# Allegro board AUTO_SAVE.brd
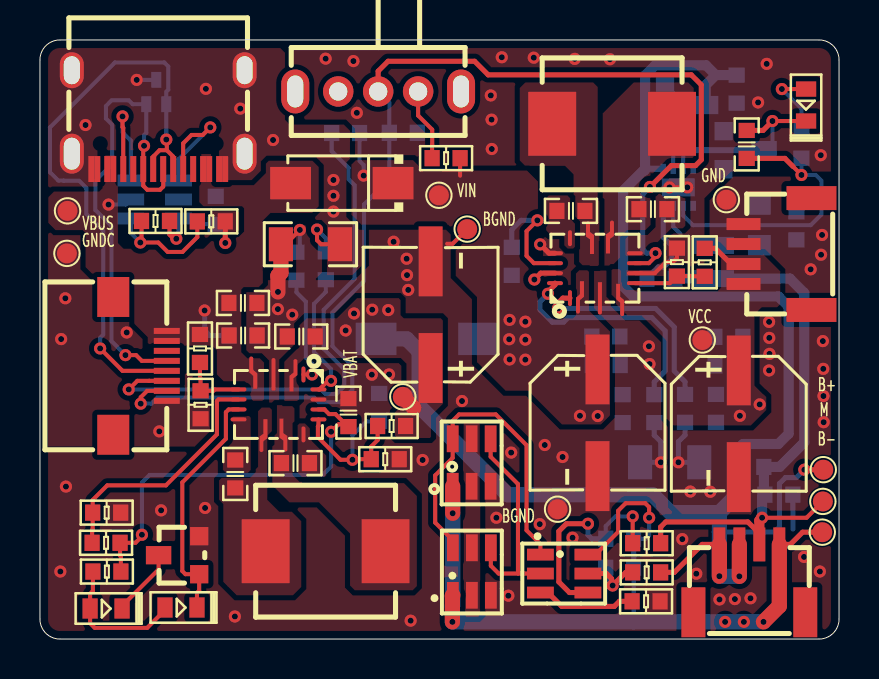
[diagram p0: board, top side]
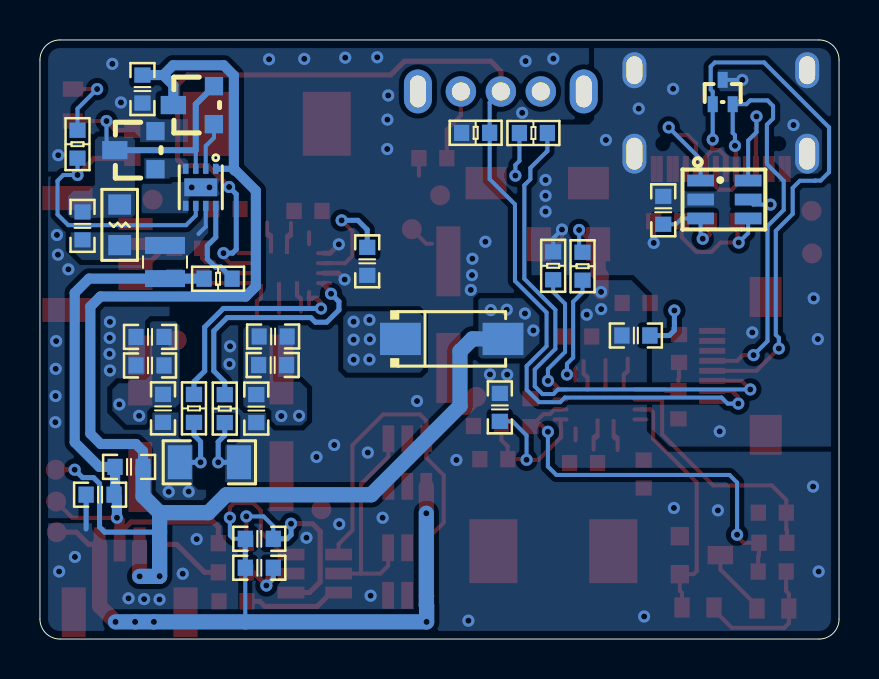
[diagram p1: board, bottom side, seen from below]

Outline 40 x 30 mm; copper layers: TOP, BOTTOM. Coordinates in mm from the lower left corner of the outline.
Outline path: 0,29 0,1 arc(0.29,0.29) 1,0 39,0 arc(39.71,0.29) 40,1 40,29 arc(39.71,29.71) 39,30 1,30 arc(0.29,29.71) 0,29

## Design rules (mm)
constraint set DEFAULT: min track width 0.203
net group N892302: nets N892302 N892320
net group N900408: nets N900465 N903479
net group 3V7: nets 3V7 N902157 N907575
net group N897015: nets N897015 N897538 N898541

## Placement (name value [footprint] x y rotation side)
C1  0.1uF  [C0603]  30.68 21.53 0 top
C2  0.1uF  [C0603]  26.58 21.44 0 top
C3  0.1uF  [C0603]  34.49 13.7 180 bottom
C4  0.1uF  [C0603]  34.49 15.13 180 bottom
C5  0.1uF  [C0603]  33.84 11.55 90 bottom
C6  100uF  [CAP_SMD-6_3X7_7]  34.98 10.78 270 top
C7  100uF  [CAP_SMD-6_3X7_7]  27.91 10.83 270 top
C8  0.1uF  [C0603]  28.35 13.72 0 bottom
C9  1uF  [C0603]  29.17 11.54 90 bottom
C10  0.1uF  [C0603]  28.33 15.15 0 bottom
C11  10uF  [C0603]  23.62 18.91 90 bottom
C13  0.1uF  [C0603]  9.78 8.27 90 top
C14  0.1uF  [C0603]  12.79 8.81 180 top
C15  1uF  [C0603]  8.8 21.47 90 bottom
C16  1uF  [C0603]  10.16 16.83 0 top
C17  22uF  [C0603]  10.17 15.2 0 top
C18  22uF  [C0603]  10.17 15.2 0 bottom
C19  10uF  [C0603]  15.44 11.34 270 top
C20  22pF  [C0603]  16.98 11.6 270 bottom
C21  22pF  [C0603]  13.08 15.15 0 top
C23  10uF  [C0603]  34.87 27.54 90 bottom
C24  10nF  [C0603]  35.38 24.77 270 top
C25  1nF  [C0603]  37.87 20.69 90 bottom
C27  10uF  [C0603]  35.54 8.62 0 bottom
C28  10uF  [C0603]  36.99 7.23 0 bottom
C29  0.1uF  [C0603]  29.02 5.02 180 bottom
C30  0.1uF  [C0603]  29.02 3.57 0 bottom
C31  100uF  [CAP_SMD-6_3X7_7]  19.55 16.24 90 top
D1  Green  [LED0603]  3.31 1.53 0 top
D2  Red  [LED0603]  7.06 1.58 0 top
D3  Red  [LED0603]  38.35 26.74 270 top
D4  SS54  [SMA_DO-214AC]  15.11 22.83 180 top
D5  SS54  [SMA_DO-214AC]  19.39 15.03 180 bottom
J2  Type-C 12P  [TYPE-C-12P]  5.92 26.01 180 top
J3  FPC_8P  [FPC_05-8P]  5.01 13.68 90 top
J4  1.0 4P SMD  [CON_1-4P-SMD]  35.51 3.04 0 top
J5  1.0 4P SMD  [CON_1-4P-SMD]  36.92 19.28 90 top
L1  6.8uH  [IND-SMD_7X6_6MM]  28.64 25.8 180 top
L2  6.8uH  [IND-SMD_7X6_6MM]  14.3 4.4 0 top
L3  1uH 5.3A  [IND-SMD_2_5X2_0MM]  33.74 18.88 270 bottom
NOREF  -  []  0 28.6 0 top
NOREF#2  -  []  1.3 0 90 top
Q3  PW2302A  [SOT-23]  6.98 4.2 90 top
Q5  AO3402A  [SOT-23]  32.28 26.74 90 bottom
Q6  AO3402A  [SOT-23]  35.21 24.48 90 bottom
Q7  SC8205S  [SOT23-6]  21.62 3.38 0 top
Q8  SC8205S  [SOT23-6]  21.61 8.84 0 top
R6  270K  [R0603]  33.28 18.86 90 top
R7  22K  [R0603]  31.88 18.87 90 top
R8  10m  [R1206]  31.52 8.85 0 bottom
R9  2.2K  [R0603]  30.75 11.54 90 bottom
R10  2.2K  [R0603]  32.29 11.55 90 bottom
R11  10K  [R0603]  20.33 24.08 0 top
R12  100K  [R0603]  18.19 25.35 180 bottom
R20  1K  [R0603]  3.35 3.38 180 top
R21  1K  [R0603]  17.28 9.01 0 top
R26  10K  [R0603]  15.3 25.34 0 bottom
R27  10m  [R1206]  13.54 19.77 180 top
R28  2.2K  [R0603]  14.31 18.69 90 bottom
R29  2.2K  [R0603]  12.84 18.67 90 bottom
R30  100K  [R0603]  5.78 20.94 0 top
R31  220K  [R0603]  8.58 20.92 0 top
R32  2.2K  [R0603]  8.01 14.55 270 top
R33  2.2K  [R0603]  8.04 11.73 270 top
R34  1K  [R0603]  3.31 4.82 0 top
R35  1K  [R0603]  3.34 6.33 0 top
R36  1K  [R0603]  17.6 10.67 180 top
R38  100R  [R0603]  31.08 18.04 180 bottom
R39  10K  [R0603]  38.12 24.78 270 bottom
R40  330R  [R0603]  30.37 4.8 180 top
R41  1K  [R0603]  30.34 1.89 180 top
R42  330R  [R0603]  30.37 3.34 0 top
R43  0R  [R0805]  36.01 20.74 270 bottom
S1  SK12D07VG4  [SW-TH_SK12D07VG4]  16.93 27.42 180 top
TP1  SMD  [TP_SMD]  19.97 22.22 0 top
TP2  SMD  [TP_SMD]  33.16 14.97 0 top
TP3  SMD  [TP_SMD]  34.36 22 0 top
TP4  SMD  [TP_SMD]  21.39 20.53 0 top
TP5  SMD  [TP_SMD]  18.16 12.13 0 top
TP7  SMD  [TP_SMD]  39.21 8.48 0 top
TP8  SMD  [TP_SMD]  39.19 6.89 0 top
TP9  SMD  [TP_SMD]  39.16 5.35 0 top
TP10  SMD  [TP_SMD]  1.38 21.44 0 top
TP11  SMD  [TP_SMD]  1.35 19.31 0 top
TP12  SMD  [TP_SMD]  25.91 6.5 0 top
U1  -  [JW3651]  27.78 18.38 0 top
U5  PW6603  [SOT23-6]  5.74 22.01 270 bottom
U6  PW4000  [QFN-3X4_15L]  11.94 11.94 180 top
U7  ETA3001  [DFN-8_2X2]  31.95 22.62 0 bottom
U8  PW7052  [SOT23-6]  26.24 3.28 270 top
Z1  RCLAMP0502B  [SOT-523]  5.82 27.39 270 bottom

## Library data of the parts
C1-C5 C8-C11 C13-C21 C23-C25 C27-C30 = C
C6 C7 C31 = CE
D1-D3 = LED
D4 D5 = DIODE
J2 = TYPE-C_12P_SMD
J3 = CON_10
J4 J5 = CON_6
L1 L2 = L
L3 = L: Tolerance: .TOL; User Part Number: E03L011
Q3 = PW2302A
Q5 Q6 = MOSFET-N
Q7 Q8 = MOSFET-N_Dual1
R6-R12 R20 R21 R26-R36 R38-R43 = R
S1 = SK12D07VG4
TP1-TP5 TP7-TP12 = TP
U1 = JW3651
U5 = PW6603
U6 = PW4000
U7 = ETA3001
U8 = PW7052
Z1 = TVS_Dual

## Footprints (pads in the part's own frame, mm; a bottom-side part is the same pattern mirrored in y, then rotated)
C0603
  rect 0.762x0.813 smd: 1(-0.7,0) 2(0.7,0)
CAP_SMD-6_3X7_7
  rect 3.5x1.199 smd: 1(-2.67,0) 2(2.67,0)
CON_1-4P-SMD
  rect 0.6x1.7 smd: 1(-1.5,1.7) 2(-0.5,1.7) 3(0.5,1.7) 4(1.5,1.7)
  rect 1.2x2.5 smd: 5(2.8,-1.7) 6(-2.8,-1.7)
DFN-8_2X2
  rect 0.28x0.505 smd: 1(-0.75,-0.928) 2(-0.25,-0.928) 3(0.25,-0.928) 4(0.75,-0.928) 5(0.75,0.928) 6(0.25,0.928) 7(-0.25,0.928) 8(-0.75,0.928)
  rect 1.65x0.9 smd: 9(0,0)
FPC_05-8P
  rect 0.3x1.3 smd: 1(-1.75,-1.34) 2(-1.252,-1.338) 3(-0.75,-1.34) 4(-0.25,-1.34) 5(0.25,-1.34) 6(0.75,-1.34) 7(1.25,-1.34) 8(1.75,-1.34)
  rect 2x1.6 smd: 9(3.45,1.34) 10(-3.45,1.34)
IND-SMD_2_5X2_0MM
  rect 0.85x2 smd: 1(-0.83,0) 2(0.83,0)
IND-SMD_7X6_6MM
  rect 2.4x3.2 smd: 1(-3,0) 2(3,0)
JW3651
  oval 0.201x0.8 smd: 1(-1.25,-1.308) 11(-1.25,1.692)
  custom 0.399x1.62 smd: 2(-0.749,-1.27)
  custom 0.201x1.621 smd: 3(0.252,-1.321)
  custom 0.401x1.621 smd: 4(1.262,-1.397)
  oval 0.8x0.201 smd: 5(2,-0.558) 6(2,-0.058) 7(2,0.442) 8(2,0.942) 12(-2,0.942) 13(-2,0.442) 14(-2,-0.058) 15(-2,-0.558)
  custom 0.399x1.649 smd: 9(0.752,1.753)
  custom 0.399x1.652 smd: 10(-0.249,1.727)
LED0603
  rect 0.762x1.016 smd: 1(-0.8,0) 2(0.8,0)
QFN-3X4_15L
  oval 0.201x0.8 smd: 1(-1.25,-1.308) 11(-1.25,1.692)
  custom 0.399x1.62 smd: 2(-0.749,-1.27)
  custom 0.201x1.621 smd: 3(0.252,-1.321)
  custom 0.401x1.621 smd: 4(1.262,-1.397)
  oval 0.8x0.201 smd: 5(2,-0.558) 6(2,-0.058) 7(2,0.442) 8(2,0.942) 12(-2,0.942) 13(-2,0.442) 14(-2,-0.058) 15(-2,-0.558)
  custom 0.399x1.649 smd: 9(0.752,1.753)
  custom 0.399x1.652 smd: 10(-0.249,1.727)
R0603
  rect 0.762x0.813 smd: 1(-0.7,0) 2(0.7,0)
R0805
  rect 1.016x1.143 smd: 1(-1.016,0) 2(1.016,0)
R1206
  rect 1.206x1.702 smd: 1(-1.479,0) 2(1.479,0)
SMA_DO-214AC
  rect 2.047x1.62 smd: 1(2.565,0) 2(-2.565,0)
SOT23-6
  rect 0.589x1.341 smd: 1(-0.95,-1.19) 2(0,-1.19) 3(0.95,-1.19) 4(0.95,1.19) 5(0,1.19) 6(-0.95,1.19)
SOT-23
  rect 0.914x0.914 smd: 1(-0.953,-0.991) 2(0.953,-0.991)
  rect 0.914x1.27 smd: 3(0,1.041)
SOT-523
  rect 0.8x0.5 smd: 1(0.608,-0.5) 2(0.608,0.5) 3(-0.608,0)
SW-TH_SK12D07VG4
  round 1.524 hole 0.914: 1(-2,0) 2(0,0) 3(2,0)
  oval 1.4x2.2 hole 0.8x1.6: 4(4.15,0) 5(-4.15,0)
TP_SMD
  round 1.001 smd: 1(0,0)
TYPE-C-12P
  rect 0.3x1.301 smd: A1(-3.35,2.474) A4(-2.55,2.474) A5(-1.25,2.474) A6(-0.25,2.474) A7(0.25,2.474) A8(1.25,2.474) A9(2.55,2.474) A12(3.35,2.474) B1(3.05,2.474) B4(2.25,2.474) B5(1.75,2.474) B6(0.75,2.474) B7(-0.75,2.474) B8(-1.75,2.474) B9(-2.25,2.474) B12(-3.05,2.474)
  oval 1.199x1.999 hole 0.8x1.6: G1(-4.325,1.706) G2(4.325,1.706)
  oval 1.199x1.801 hole 0.8x1.399: G3(-4.325,-2.474) G4(4.325,-2.474)

## Nets
3V7: C27.2 C28.1 J4.3 L3.2 R38.1 R40.1 TP8.1
GND: C3.1 C4.1 C5.1 C6.2 J5.3 J5.4 R8.2 R10.1 TP3.1
GNDC: C15.2 J2.A1 J2.A12 J2.B1 J2.B12 J2.G1 J2.G2 J2.G3 J2.G4 J3.1 R27.1 R28.2 R31.2 R33.2 TP11.1 U5.2 Z1.3
VBAT: C21.2 C23.2 C27.1 C31.1 D5.1 J4.1 J4.2 Q5.3 R36.1 R42.2 TP5.1 TP7.1 U6.2 U7.1
VBUS: C16.1 C17.1 C18.1 D4.1 J2.A4 J2.A9 J2.B4 J2.B9(\VBUS4\) J3.7 J3.8 R32.1 TP10.1 U5.5 U6.4(\VIN\)
VCC: C3.2 C4.2 C5.2 C6.1 J5.1 J5.2 R6.2 TP2.1 U1.4(\VO\)
VIN: C7.1 C8.2 C9.2 C10.2 D4.2 D5.2 R11.2 R26.2 TP1.1 U1.2
VIN_EN: J3.3 R26.1
B-: C29.1 C30.2 J4.4 Q7.1 Q8.1 TP9.1 U8.6(\VSS\)
BGND: C7.2 C8.1 C9.1 C10.1 C11.1 C16.2 C17.2 C18.2 C19.1 C20.1 C21.1 C23.1 C28.2 C31.2 Q3.2(\S\) Q6.2(\S\) Q7.3(\S\) Q8.3(\S\) R7.2 R8.1 R9.1 R12.1 R21.2 R27.2 R29.2 R35.2 R41.1 TP4.1 TP12.1 U1.3 U1.6 U1.12 U1.14 U6.3 U6.14 U7.5 U7.9
CC1: J2.A5 U5.1
CC2: J2.B5 U5.6
EN: J3.2 R12.2 S1.2 U1.7
USB_D+: J2.A6 J2.B6 J3.5 Z1.2
USB_D-: J2.A7 J2.B7 J3.4 Z1.1
N750395: C1.2 U1.8
N750403: C1.1 L1.1 U1.9
N750411: C2.2 L1.2 U1.10
N750419: C2.1 U1.11
N751001: R6.1 R7.1 U1.5
N751035: C11.2 U1.13
N751251: R10.2 U1.1
N751255: R9.2 U1.15
N751437: R11.1 S1.1
N891761: C13.2 U6.8
N891769: C13.1 L2.1 U6.9
N891777: C14.2 L2.2 U6.10
N891785: C14.1 U6.11
N892137: R28.1 U6.15
N892144: R29.1 U6.1
N892302: R30.1 R31.1 U5.4
N892320: C15.1 R30.2 U5.3(\VDD\)
N892674: R32.2 R33.1 U6.5
N896164: D2.2(\CATHODE\) Q3.1 U6.7
N896252: D1.2(\CATHODE\) Q3.3
N897015: D1.1 D2.1 R20.2
N897538: C19.2 R20.1 R34.2 U6.13
N898541: R34.1 R35.1 U6.6
N898788: C20.2 R21.1 R36.2 U6.12
N900408: C24.1 C25.2 D3.2(\CATHODE\) Q5.2(\S\) Q6.3 R43.1 U7.3(\SW\)
N900465: C24.2 R39.2 U7.6
N900484: Q5.1 U7.2
N900496: Q6.1 U7.4
N900671: C25.1 L3.1 R43.2 U7.7
N902157: R38.2 U7.8
N903479: D3.1 R39.1
N907575: C29.2 R40.2 U8.4
N907602: Q7.6 Q8.6 U8.1
N907620: Q7.4 Q8.4 U8.2
N907664: R41.2 U8.3
N907915: C30.1 R42.1 U8.5
N908615: Q7.2 Q7.5 Q8.2 Q8.5

Pads without a net: J2 A8 B8; J3 6 9 10; J4 5 6; J5 5 6; S1 3 4 5

## Via types
v1: diameter 0.61, hole 0.305, TOP to BOTTOM, 133 vias

## Routing (per net, layer and track width the routed paths; a pad name or vN(x,y) marks a point on that pad's centre or on a via; arc(x,y) is an arc through that point)
3V7: length 30.3
  TOP w0.203: TP8.1 38.37,6.07 v1(36.15,6.07)
  TOP w0.254: R40.1 31.07,5.61 31.32,5.86 35.44,5.86 36.01,5.29
  TOP w0.508: J4.3 36.01,5.94 v1(36.15,6.07)
  BOTTOM w0.508: v1(36.15,6.07) 36.15,7.09 C28.1 36.24,7.28 C27.2 37.03,8.62 38.26,9.85 38.26,17.33 37.54,18.05 L3.2 31.79,18.05 R38.1
GND: length 3.2
  BOTTOM w0.254: R8.2 v1(31.96,8.85) 31.96,9.89 32.29,10.22 R10.1
  vias: v1(32.55,7.39) v1(33.56,7.38) v1(36.5,15.88) v1(36.51,15.08) v1(36.52,14.28) v1(36.5,13.45) v1(38.58,18.51) v1(39.15,20.24) v1(39.1,19.24) v1(39.19,14.92) v1(39.21,13.53) v1(39.22,12.17) v1(39.23,10.86)
GNDC: length 5.1
  TOP w0.203: R27.1 14.07,19.77 13.87,19.97 v1(13.87,20.51)
  TOP w0.254: R31.2 v1(9.28,19.83)
  BOTTOM w0.203: Z1.3 v1(4.84,28) ; v1(13.87,20.51) 14.31,20.07 R28.2
  vias: v1(1.06,15.02) v1(1.27,17.06) v1(2.28,25.74) v1(4.34,15.35) v1(5.97,10.4) v1(8.31,27.55) v1(10.03,26.56) v1(11.67,24.99) v1(14.69,22.99) v1(14.69,22.2) v1(14.69,21.41)
VBAT: length 82
  TOP w0.254: J4.1 33.15,4.74 31.75,3.34 R42.2 ; TP7.1 v1(38.26,8.48)
  TOP w0.762: TP5.1 18.71,11.58 ; J4.1 v1(34.01,3.15) ; J4.2 v1(35.01,3.14)
  BOTTOM w0.254: v1(38.26,8.48) 37.87,8.08 37.32,8.08 37.02,7.79 37.02,5.61 36.76,5.35 34.02,5.35 34.01,5.36
  BOTTOM w0.305: 30.29,23.51 30.33,23.55 U7.1
  BOTTOM w0.508: 33.83,28.24 33.32,27.73 Q5.3 ; 33.83,28.24 C23.2 ; 33.83,28.24 33.34,28.73 30.8,28.73 30.29,28.22 30.29,23.51 30.24,23.45 30.2,23.45 29.19,22.45 29.19,17.66 29.7,17.15 36.97,17.15 37.48,16.65 37.48,10.29 36.96,9.77 35.2,9.77 34.84,9.41 C27.1
  BOTTOM w0.762: 34.01,6.33 v1(34.01,3.15) 34.02,3.14 v1(35.01,3.14) ; 34.01,6.33 31.57,6.33 30.67,7.23 23.42,7.23 18.97,11.67 18.97,14.41 18.36,15.03 D5.1 ; 34.01,6.33 34.84,7.16 C27.1
  vias: v1(15.3,15.45) v1(15.72,16.3) v1(16.63,16.49) v1(17.43,16.47)
VBUS: length 3.6
  BOTTOM w0.203: v1(3.43,21.76) 4.3,21.76 U5.5
  BOTTOM w0.254: v1(8.24,16.45) 8.24,15.45 8.5,15.2 C17.1
VCC: length 2.3
  TOP w0.254: R6.2 33.81,19.56 34.59,18.78 J5.2
  vias: v1(35.04,11.18) v1(36.03,11.75)
VIN: length 3.1
  TOP w0.203: R11.2 21.03,23.2
  BOTTOM w0.203: v1(16.2,23.21) 16.2,23.74 16,23.94 R26.2
  vias: v1(23.51,15.98) v1(23.49,15.01) v1(23.51,14) v1(24.3,15.89) v1(24.3,14.99) v1(24.3,13.99) v1(27.03,11.18) v1(27.92,11.17)
VIN_EN: length 27.4
  TOP w0.203: v1(4.44,12.5) 4.87,12.93 5.47,12.93 J3.3
  BOTTOM w0.203: R26.1 14.6,24.43 14.61,24.42 14.63,24.42 15.45,23.59 15.45,23.02 15.75,22.72 15.75,18.04 14.2,16.49 14.2,14.53 15.23,13.5 15.23,12.66 14.84,12.27 14.3,12.27 14.07,12.5 v1(4.44,12.5)
B-: length 41.6
  TOP w0.203: v1(30.49,6.07) 30.49,6.61 30.3,6.8 29.32,6.8 28.94,6.42 28.94,5.37 27.81,4.23 U8.6
  TOP w0.254: TP9.1 38.17,5.35 37.56,4.74 J4.4
  TOP w0.762: v1(36.22,0.86) 37.01,1.65 J4.4 ; Q7.1 20.65,2.17 v1(20.65,0.86) ; Q8.1 v1(20.66,6.3)
  BOTTOM w0.203: 29.72,0.86 29.72,2.93 29.72,2.93 C30.2 ; 29.72,5.05 C29.1 30.33,5.02 30.49,5.18 v1(30.49,6.07)
  BOTTOM w0.254: C29.1 C30.2
  BOTTOM w0.762: v1(20.66,6.3) 20.66,1.69 20.65,1.67 v1(20.65,0.86) v1(34.3,0.86) v1(35.24,0.86) v1(36.22,0.86)
BGND: length 17
  TOP w0.203: 20.38,19.8 20.66,19.8 TP4.1 ; v1(31.51,22.62) v1(32.4,22.62) ; R27.2 12.29,19.77 v1(13.01,20.49) ; U1.6 30.78,18.32 31.33,18.87 31.68,18.87 31.88,19.08 R7.2
  TOP w0.254: v1(25.04,19.76) 25.48,19.32 U1.12 ; v1(24.75,18) 25.07,18.32 U1.14
  TOP w0.762: R27.2 12.06,18.34 11.91,18.2 v1(11.91,17.38)
  BOTTOM w0.203: R29.2 13.01,19.54 v1(13.01,20.49)
  BOTTOM w0.254: R9.1 30.75,10.21 31.08,9.88 v1(31.08,8.85) R8.1 ; C28.2 37.69,5.51
  vias: v1(1.02,3.38) v1(1.3,7.64) v1(6.06,6.44) v1(8.27,6.56) v1(9.76,1.13) v1(11.91,16.52) v1(12.63,16.24) v1(14.3,29.06) v1(15.69,28.94) v1(15.86,26.35) v1(16.61,13.24) v1(17.47,13.25) v1(17.7,19.9) v1(18.35,19.04) v1(18.37,18.22) v1(18.43,17.48) v1(18.55,0.92) v1(19.15,8.97) v1(21.13,11.92) v1(22.57,27.22) v1(22.61,26.01) v1(22.62,24.54) v1(22.85,6.07) v1(23.12,29.13) v1(23.45,2.17) v1(23.59,9.34) v1(24.72,29.11) v1(25.02,5.75) v1(25.27,9.72) v1(26.16,9.12) v1(26.66,5.07) v1(26.77,29.05) v1(28.53,29.03) v1(30.48,14.66) v1(30.51,13.77) v1(32.15,5) v1(32.85,3.27) v1(34.02,1.98) v1(34.79,2) v1(35.57,2.04) v1(35.95,26.87) v1(36.38,28.8) v1(38.25,4.11) v1(39.04,3.38) v1(39.09,24.23)
CC1: length 6.3
  TOP w0.203: v1(8.53,25.62) 8.15,25.24 7.59,25.24 7.17,24.82 J2.A5
  BOTTOM w0.203: v1(8.53,25.62) 6.93,24.02 U5.1
CC2: length 6
  TOP w0.203: v1(4.13,26.17) 4.13,25.64 4.17,25.6 J2.B5
  BOTTOM w0.203: U5.6 4.55,24.96 4.13,25.38 v1(4.13,26.17)
EN: length 59.7
  TOP w0.203: J3.2 5.37,12.43 5.04,12.11 v1(5.04,11.79) ; U1.7 30.48,18.82 30.81,19.15 v1(30.81,19.32)
  TOP w0.254: v1(30.53,22.64) 31.6,23.71 32.81,23.71 33.11,24 33.11,27.75 32.6,28.25 22.44,28.25 21.76,28.93 17.43,28.93 16.93,28.44 S1.2
  BOTTOM w0.203: S1.2 17.49,26.86 R12.2 17.49,23.03 16.22,21.77 16.22,17.93 14.64,16.35 14.64,14.67 15.64,13.67 15.64,12.49 15.01,11.86 13.96,11.86 13.73,12.09 5.88,12.09 5.58,11.79 v1(5.04,11.79)
  BOTTOM w0.254: v1(30.53,22.64) 30.17,22.28 30.17,19.51 30.36,19.32 v1(30.81,19.32)
USB_D+: length 24.2
  TOP w0.203: v1(4.28,14.22) 4.81,14.22 5.1,13.93 J3.5 ; J2.A6 6.17,22.66 6.01,22.5 5.37,22.5 5.17,22.7 J2.B6 5.17,24.66 v1(5.21,24.7)
  BOTTOM w0.203: v1(5.21,24.7) 5.21,25.23 5.32,25.35 Z1.2 4.64,26.78 4.45,26.97 3.59,26.97 3.3,26.69 3.3,26.07 3.61,25.76 3.61,23.79 2.77,22.95 2.77,21.48 3.58,20.67 3.58,14.91 v1(4.28,14.22)
USB_D-: length 30.8
  TOP w0.203: J3.4 4.13,13.43 v1(3.01,14.55) ; 6.35,24.48 6.67,24.16 J2.B7 ; 6.35,24.48 6.35,24.78 6.32,24.81 v1(6.32,25.01) ; 6.35,24.48 5.99,24.48 5.67,24.16 J2.A7
  BOTTOM w0.203: v1(3.01,14.55) 3.01,15.08 3.17,15.24 3.17,20.44 2.32,21.29 2.32,22.59 1.96,22.95 1.2,22.95 1.19,22.96 0.92,22.96 0.5,23.38 0.5,25.62 3.75,28.87 6.22,28.87 6.42,28.67 6.42,27.51 6.32,27.41 Z1.1 6.32,25.31 v1(6.32,25.01)
N751001: length 3.6
  TOP w0.203: R6.1 32.64,18.16 32.63,18.17 R7.1 31.53,17.82 U1.5
N751035: length 5.9
  TOP w0.203: v1(24.9,20.97) 24.36,20.43 24.36,19.19 24.72,18.82 U1.13
  BOTTOM w0.254: C11.2 23.62,20.5 24.09,20.97 v1(24.9,20.97)
N751251: length 10.8
  TOP w0.254: v1(25.93,16.55) 25.97,16.59 25.97,16.87 26.18,17.07 U1.1
  BOTTOM w0.254: R10.2 32.29,12.89 31.75,13.42 31.75,15.62 30.82,16.55 v1(25.93,16.55)
N751255: length 12
  TOP w0.254: U1.15 25.78,17.74 25.43,17.39 v1(25.43,17.29)
  BOTTOM w0.254: R9.2 30.75,12.88 31.3,13.42 31.3,15.43 30.63,16.1 26.44,16.1 26.21,15.87 25.65,15.87 25.03,16.48 25.03,16.89 v1(25.43,17.29)
N751437: length 3.6
  TOP w0.203: S1.1 18.93,26.21 19.63,25.51 19.63,24.72 19.63,24.71 R11.1
N892137: length 6.5
  TOP w0.203: U6.15 13.98,12.5 14.41,12.93 v1(14.57,12.93)
  BOTTOM w0.203: R28.1 14.31,17.38 13.72,16.79 13.72,14.37 14.57,13.52 v1(14.57,12.93)
N892144: length 5.5
  TOP w0.203: v1(13.62,13.25) U6.1
  BOTTOM w0.203: v1(13.62,13.25) 13.62,13.78 13.31,14.09 13.31,16.89 12.84,17.36 R29.1
N892302: length 6.7
  TOP w0.203: R30.1 5.08,19.92 v1(5.02,19.86) 5.92,19.86 6.39,19.38 7.14,19.38 7.88,20.13 R31.1
  BOTTOM w0.203: v1(5.02,19.86) 4.55,20.33 U5.4
N892320: length 4.2
  TOP w0.203: v1(6.83,20.05) 6.82,20.04 6.69,20.04 6.48,20.25 R30.2
  BOTTOM w0.203: C15.1 8.17,20.77 7.88,21.06 U5.3 6.93,20.15 v1(6.83,20.05)
N892674: length 3.4
  TOP w0.203: R32.2 8.01,13.07 8.04,13.04 R33.1 8.67,12.43 8.74,12.5 U6.5
N896164: length 12.2
  TOP w0.203: D2.2 7.86,2.32 7.97,2.43 Q3.1 7.28,3.25 7.13,3.41 7.13,7.85 9.31,10.03 9.31,11.36 9.45,11.5 U6.7
N896252: length 3.4
  TOP w0.203: D1.2 4.11,1.66 5.94,3.49 Q3.3
N897015: length 7
  TOP w0.203: R20.2 2.65,2.41 2.51,2.27 D1.1 2.51,0.79 2.74,0.56 5.37,0.56 6.26,1.45 D2.1
N897538: length 19.7
  TOP w0.203: 15.3,10.76 14.95,10.76 v1(14.57,10.38) ; 15.3,10.76 15.42,10.64 C19.2 ; 15.3,10.76 14.79,11.27 14.47,11.27 14.24,11.5 U6.13 ; R20.1 4.05,4.15 4.01,4.19 R34.2 4.78,4.82 5.1,5.14 v1(5.1,5.22)
  BOTTOM w0.203: v1(5.1,5.22) 5.1,7.84 5.48,8.22 14.15,8.22 14.57,8.64 v1(14.57,10.38)
N898541: length 12.5
  TOP w0.203: U6.6 8.94,12 8.86,11.92 8.86,10.25 6.3,7.7 3.37,7.7 2.64,6.97 R35.1 2.64,5.49 2.61,5.46 R34.1
N898788: length 8.7
  TOP w0.203: R36.2 16.9,9.96 16.58,9.64 R21.1 15.67,9.01 v1(15.64,8.98) 15.04,8.98 13.91,10.11 13.91,10.64 13.94,10.67 U6.12
  BOTTOM w0.203: v1(15.64,8.98) 15.64,10.2 16.35,10.9 C20.2
N900408: length 13.4
  TOP w0.203: D3.2 v1(36.67,25.94)
  TOP w0.254: v1(36.67,25.94) 36.2,25.47 C24.1
  BOTTOM w0.203: v1(36.67,25.94) 36.67,24.9 Q6.3 ; 32.2,24.48 32.2,24.48 U7.3
  BOTTOM w0.305: Q5.2 32.2,26.78 32.2,24.48 Q6.3
N900465: length 14.6
  TOP w0.203: 37.7,23.66 v1(38.12,23.24)
  TOP w0.254: 37.7,23.66 37.29,24.07 C24.2
  BOTTOM w0.203: U7.6 32.2,21.21 32.69,20.73 38.58,20.73 39.12,21.26 39.12,22.95 38.83,23.24 v1(38.12,23.24) R39.2
N900484: length 2.4
  BOTTOM w0.203: Q5.1 31.29,25.1 31.7,24.69 U7.2
N900671: length 1.6
  BOTTOM w0.203: 32.06,20.29 31.7,20.65 U7.7
N902157: length 4.5
  BOTTOM w0.254: U7.8 31.2,20.12 31.62,19.69 31.62,19.03 31.22,18.63 30.94,18.63 30.38,18.07 R38.2
N903479: length 3.7
  TOP w0.203: v1(37.14,27.54) D3.1
  BOTTOM w0.203: R39.1 38.12,26.56 v1(37.14,27.54)
N907575: length 10.9
  TOP w0.203: R40.2 v1(29.67,6.14)
  TOP w0.254: U8.4 26.51,2.33 25.97,2.86 25.97,5.4 26.35,5.77 v1(27.43,5.77)
  BOTTOM w0.203: C29.2 28.32,5.66 28.81,6.14 v1(29.67,6.14)
  BOTTOM w0.254: C29.2 27.63,5.02 27.43,5.22 v1(27.43,5.77)
N907602: length 17.3
  TOP w0.203: U8.1 25.05,4.75 24.36,5.44 24.36,9.71 22.82,11.25 20.98,11.25 20.66,10.93 Q8.6 20.66,9.07 19.79,8.2 19.79,5.83 20.67,4.95 Q7.6
N907620: length 10.9
  TOP w0.203: 23.93,3.28 23.93,7.76 22.56,9.13 Q8.4 ; 23.93,3.28 U8.2 ; 23.93,3.28 22.96,3.28 22.57,3.67 Q7.4
N907664: length 5
  TOP w0.254: R41.2 29,1.89 28.75,1.64 26.12,1.64 25.43,2.33 U8.3
N907915: length 4
  TOP w0.254: U8.5 28.35,3.28 28.61,3.02 28.61,2.74 v1(28.67,2.68) 29.32,3.34 R42.1
  BOTTOM w0.254: C30.1 28.32,3.03 v1(28.67,2.68)

## Copper pours and planes (outline as drawn; the poured copper is in the pictures)
GND on TOP: 32.33,6.05 31.68,6.71 31.68,11.82 31.94,12.08 33.07,12.08 33.52,12.53 33.52,21.97 34.71,23.16 39.59,23.16 39.59,6.05
GND on BOTTOM: 34.17,23.16 39.59,23.16 39.59,6.05 32.33,6.05 31.68,6.71 31.68,7.48 32.08,7.48 32.34,7.74 32.34,9.7 32.6,9.96 32.88,9.96 33.07,10.14 33.07,11.25 32.98,11.34 31.72,11.34 31.68,11.3 31.68,11.82 31.94,12.08 33.07,12.08 33.52,12.53 33.52,22.51 ; 2 cut-outs
GNDC on TOP: 0.41,29 0.58,29.42 1,29.59 12.03,29.59 12.26,29.36 12.26,26 12.51,25.76 15.21,25.76 15.52,25.45 15.52,24.9 15.52,24.89 15.52,21.72 16.21,21.03 16.21,18.8 15.63,18.22 14.35,18.22 14.37,18.24 14.37,20.71 14.09,20.99 12.83,20.99 12.57,20.73 12.57,18.22 10.29,18.22 9.37,17.3 9.37,10.52 8.49,9.64 0.41,9.64 ; 1 cut-out
GNDC on BOTTOM: 15.63,18.22 10.29,18.22 9.37,17.3 9.37,10.52 8.49,9.64 0.41,9.64 0.41,29 0.58,29.42 1,29.59 12.26,29.59 12.26,26.01 12.27,26.01 12.52,25.76 15.21,25.76 15.52,25.45 15.52,21.72 16.21,21.03 16.21,18.8
VBAT on TOP: 12.26,11.92 12.87,11.92 12.96,12.01 12.96,13.79 13.24,14.07 18.06,14.07 18.34,13.79 18.34,11.93 17.77,11.36 17.77,10.17 17.87,10.07 19.51,10.07 19.57,10.12 19.57,11.18 20.17,11.78 20.17,15.96 20.07,16.06 18.21,16.06 18.05,16.22 18.05,16.97 17.95,17.07 15.87,17.07 14.86,16.06 13.34,16.06 12.98,15.7 12.98,14.63 12.23,13.88 12.23,11.95
VBAT on BOTTOM: 15.76,14.05 17.91,14.05 18.05,14.19 18.05,16.97 17.95,17.07 15.86,17.07 14.99,16.2 14.99,14.82
VBUS on TOP: 3.13,24.22 3.13,22.58 2.96,22.41 0.7,22.41 0.42,22.13 0.42,20.84 0.78,20.48 2.14,20.48 2.28,20.34 2.28,18.62 2.6,18.3 4.59,18.3 4.72,18.17 4.72,15.79 5.39,15.12 5.39,14.69 8.62,14.69 8.86,14.45 8.86,13.25 9.2,12.91 10.25,12.91 10.53,12.63 10.53,12.07 10.67,11.93 11.13,11.93 11.22,12.02 11.22,13.84 11,14.06 10.38,14.06 10.08,14.36 10.08,17.5 10.2,17.62 10.95,17.62 11.16,17.83 11.16,18.43 11.15,18.44 11.15,20.95 11.54,21.34 13.62,21.34 13.95,21.67 13.95,23.64 13.64,23.95 11.45,23.95 11.31,23.81 11.31,23.34 10.7,22.73 8.78,22.73 8.71,22.8 8.71,24.21 8.63,24.29 8.05,24.29 7.98,24.22 7.98,21.88 8.18,21.68 10.11,21.68 10.22,21.56 10.22,21.56 10.22,20.41 9.95,20.14 8.78,20.14 8.19,19.54 4.18,19.54 3.9,19.83 3.9,24.21 3.91,24.22
VCC on TOP: 28.61,18.46 28.61,17.24 28.83,17.02 28.83,16.78 29.4,16.21 30.11,16.21 31.35,14.97 31.35,11.06 31.71,10.7 35.59,10.7 36.36,11.47 36.36,12.12 36.23,12.25 36.21,12.25 35.77,12.69 35.77,16.25 36.13,16.61 36.9,16.61 37.06,16.77 37.06,18.41 36.21,19.26 34.32,19.26 34.1,19.04 34.1,17.59 33.91,17.4 30.07,17.4 29.89,17.58 29.37,17.58 29.1,17.85 29.1,18.42 29,18.52 28.67,18.52
VCC on BOTTOM: 33.22,11.6 34.44,11.6 34.63,11.41 34.63,10.84 34.74,10.73 35.67,10.73 36.38,11.44 36.38,12.5 36.07,12.81 35.63,12.81 35.46,12.98 34.7,12.98 34.49,13.19 34.49,15.81 34.39,15.91 33.22,15.91 33.02,15.71 33.02,11.8
VIN on TOP: 26.83,18.3 26.83,16.21 26.67,16.05 25.39,16.05 24.93,16.51 24.93,22.91 24.38,23.46 19.19,23.46 18.67,23.98 15.81,23.98 15.59,23.76 15.59,21.25 16.09,20.75 20.44,20.75 20.82,20.37 20.82,18.18 21.88,17.12 21.88,13.87 23.31,12.43 24.44,12.43 26.13,10.75 28.08,10.75 28.53,11.2 28.53,15.4 27.48,16.45 27.48,18.38 27.4,18.46 26.99,18.46
VIN on BOTTOM: 20.83,16.15 20.83,13.5 20.99,13.34 24.61,13.34 24.82,13.55 24.82,16.2 24.61,16.41 21.09,16.41
VIN on BOTTOM: 28.57,11.57 29.68,11.57 29.82,11.71 29.82,15.51 29.59,15.74 28.59,15.74 28.35,15.5 28.35,12.96 28.27,12.88 26.98,12.88 26.63,12.53 26.63,10.97 26.9,10.7 28.17,10.7 28.42,10.95 28.42,11.42
BGND on TOP: 39.59,1 39.42,0.58 39,0.41 1,0.41 0.58,0.58 0.41,1 0.41,29 0.58,29.42 1,29.59 39,29.59 39.42,29.42 39.59,29 ; 4 cut-outs
BGND on BOTTOM: 32.55,21.32 34.84,21.32 34.91,21.39 34.91,22.72 34.83,22.8 33.14,22.8 32.52,22.19 32.52,21.35
BGND on BOTTOM: 39.59,1 39.42,0.58 39,0.41 1,0.41 0.58,0.58 0.41,1 0.41,29 0.58,29.42 1,29.59 39,29.59 39.42,29.42 39.59,29 ; 6 cut-outs
N750395 on TOP: 30.72,19.66 30.72,19.68 31.6,20.57 32.17,20.57 32.3,20.7 32.3,22.18 32.18,22.3 30.9,22.3 30.71,22.11 30.71,20.7 30.37,20.36 29.55,20.36 29.54,20.37 29.22,20.05 29.22,19.25 29.36,19.11 30.17,19.11
N750403 on TOP: 28.1,26.25 28.1,18.77 28.17,18.7 28.64,18.7 29.05,19.11 29.05,20.14 29.4,20.49 30.31,20.49 30.56,20.74 30.56,23.33 32.2,23.33 32.94,24.06 32.94,27.75 32.95,27.75 32.63,28.06 29.91,28.06
N750411 on TOP: 26.71,21.11 26.99,20.83 26.99,18.88 27.19,18.68 27.92,18.68 28,18.76 28,21.92 27.92,22 27.92,27.65 27.69,27.87 24.3,27.87 24.02,27.59 24.02,23.97 24.29,23.7 26.28,23.7 26.71,23.27
N750419 on TOP: 25.34,22.08 25.34,20.47 25.53,20.28 26.1,20.28 26.25,20.13 26.25,19.71 26.41,19.55 26.69,19.55 26.78,19.64 26.78,20.82 26.54,21.06 26.54,22.08 26.4,22.22 25.48,22.22
N891761 on TOP: 9.31,8.33 10.41,8.33 10.55,8.47 10.55,11.09 10.47,11.17 9.44,11.17 9.16,10.89 9.16,8.48
N891769 on TOP: 11.1,11.59 11.5,11.59 11.61,11.48 11.61,10.42 11.38,10.19 11.38,6.98 11.98,6.37 12.61,6.37 13.08,5.9 13.08,2.61 12.66,2.19 9.85,2.19 9.18,2.86 9.18,6.77 8.97,6.98 8.97,7.95 9.23,8.21 10.5,8.21 10.92,8.63 10.92,11.41
N891777 on TOP: 11.51,9.52 11.51,7.83 12.49,6.85 13.96,6.85 15.52,5.28 15.52,2.68 15.76,2.44 18.65,2.44 18.86,2.65 18.86,7.17 18.22,7.81 13.17,7.81 12.74,8.24 12.74,11.55 12.58,11.71 11.84,11.71 11.74,11.61 11.74,9.75
N891785 on TOP: 12.9,10.71 12.9,8.33 13.1,8.13 14.26,8.13 14.33,8.2 14.33,9.5 13.99,9.84 13.79,9.84 13.51,10.12 13.51,10.55 13.26,10.8 12.99,10.8
N900408 on BOTTOM: 35.41,21.1 37.12,21.1 37.28,20.94 38.44,20.94 38.61,21.11 38.61,22.17 38.32,22.46 37.54,22.46 37.25,22.75 37.25,24.98 37.07,25.16 35.41,25.16 35.25,25 35.25,21.26
N900496 on BOTTOM: 32.49,23.85 32.49,23.19 32.54,23.14 33.46,23.14 33.66,22.94 34.63,22.94 34.78,23.09 34.78,24.08 34.75,24.11 32.75,24.11
N900671 on BOTTOM: 31.44,21.98 31.44,20.47 31.78,20.13 31.78,19.98 32.77,18.98 37.9,18.98 38.46,19.54 38.46,20.38 38.02,20.82 33.43,20.82 33.02,21.23 32.04,21.23 31.93,21.34 31.93,21.98 31.83,22.08 31.54,22.08
N908615 on TOP: 21.35,1.1 21.92,1.1 22.04,1.22 22.04,10.76 21.88,10.92 21.35,10.92 21.18,10.75 21.18,1.27

## Text on the board
Ref Des/Silkscreen Top: GNDC | VBUS | VIN | BGND | VCC | GND | B- | B+ | M | VBAT
